# Altium PCB STM32EVALBOARD.PcbDoc (part 2 of 2)
Units mil, origin at the board's own origin, x right, y up, seen from the top; angles counter-clockwise.
Board outline 3937.01 x 3937.01 mil, 4 copper layers (Top Layer, GND, POWER, Bottom Layer), stack 23.756 mil thick; 220 components, 164 nets, 674 pads, 227 vias.
Unrouted connection lines stored in the file: 178.
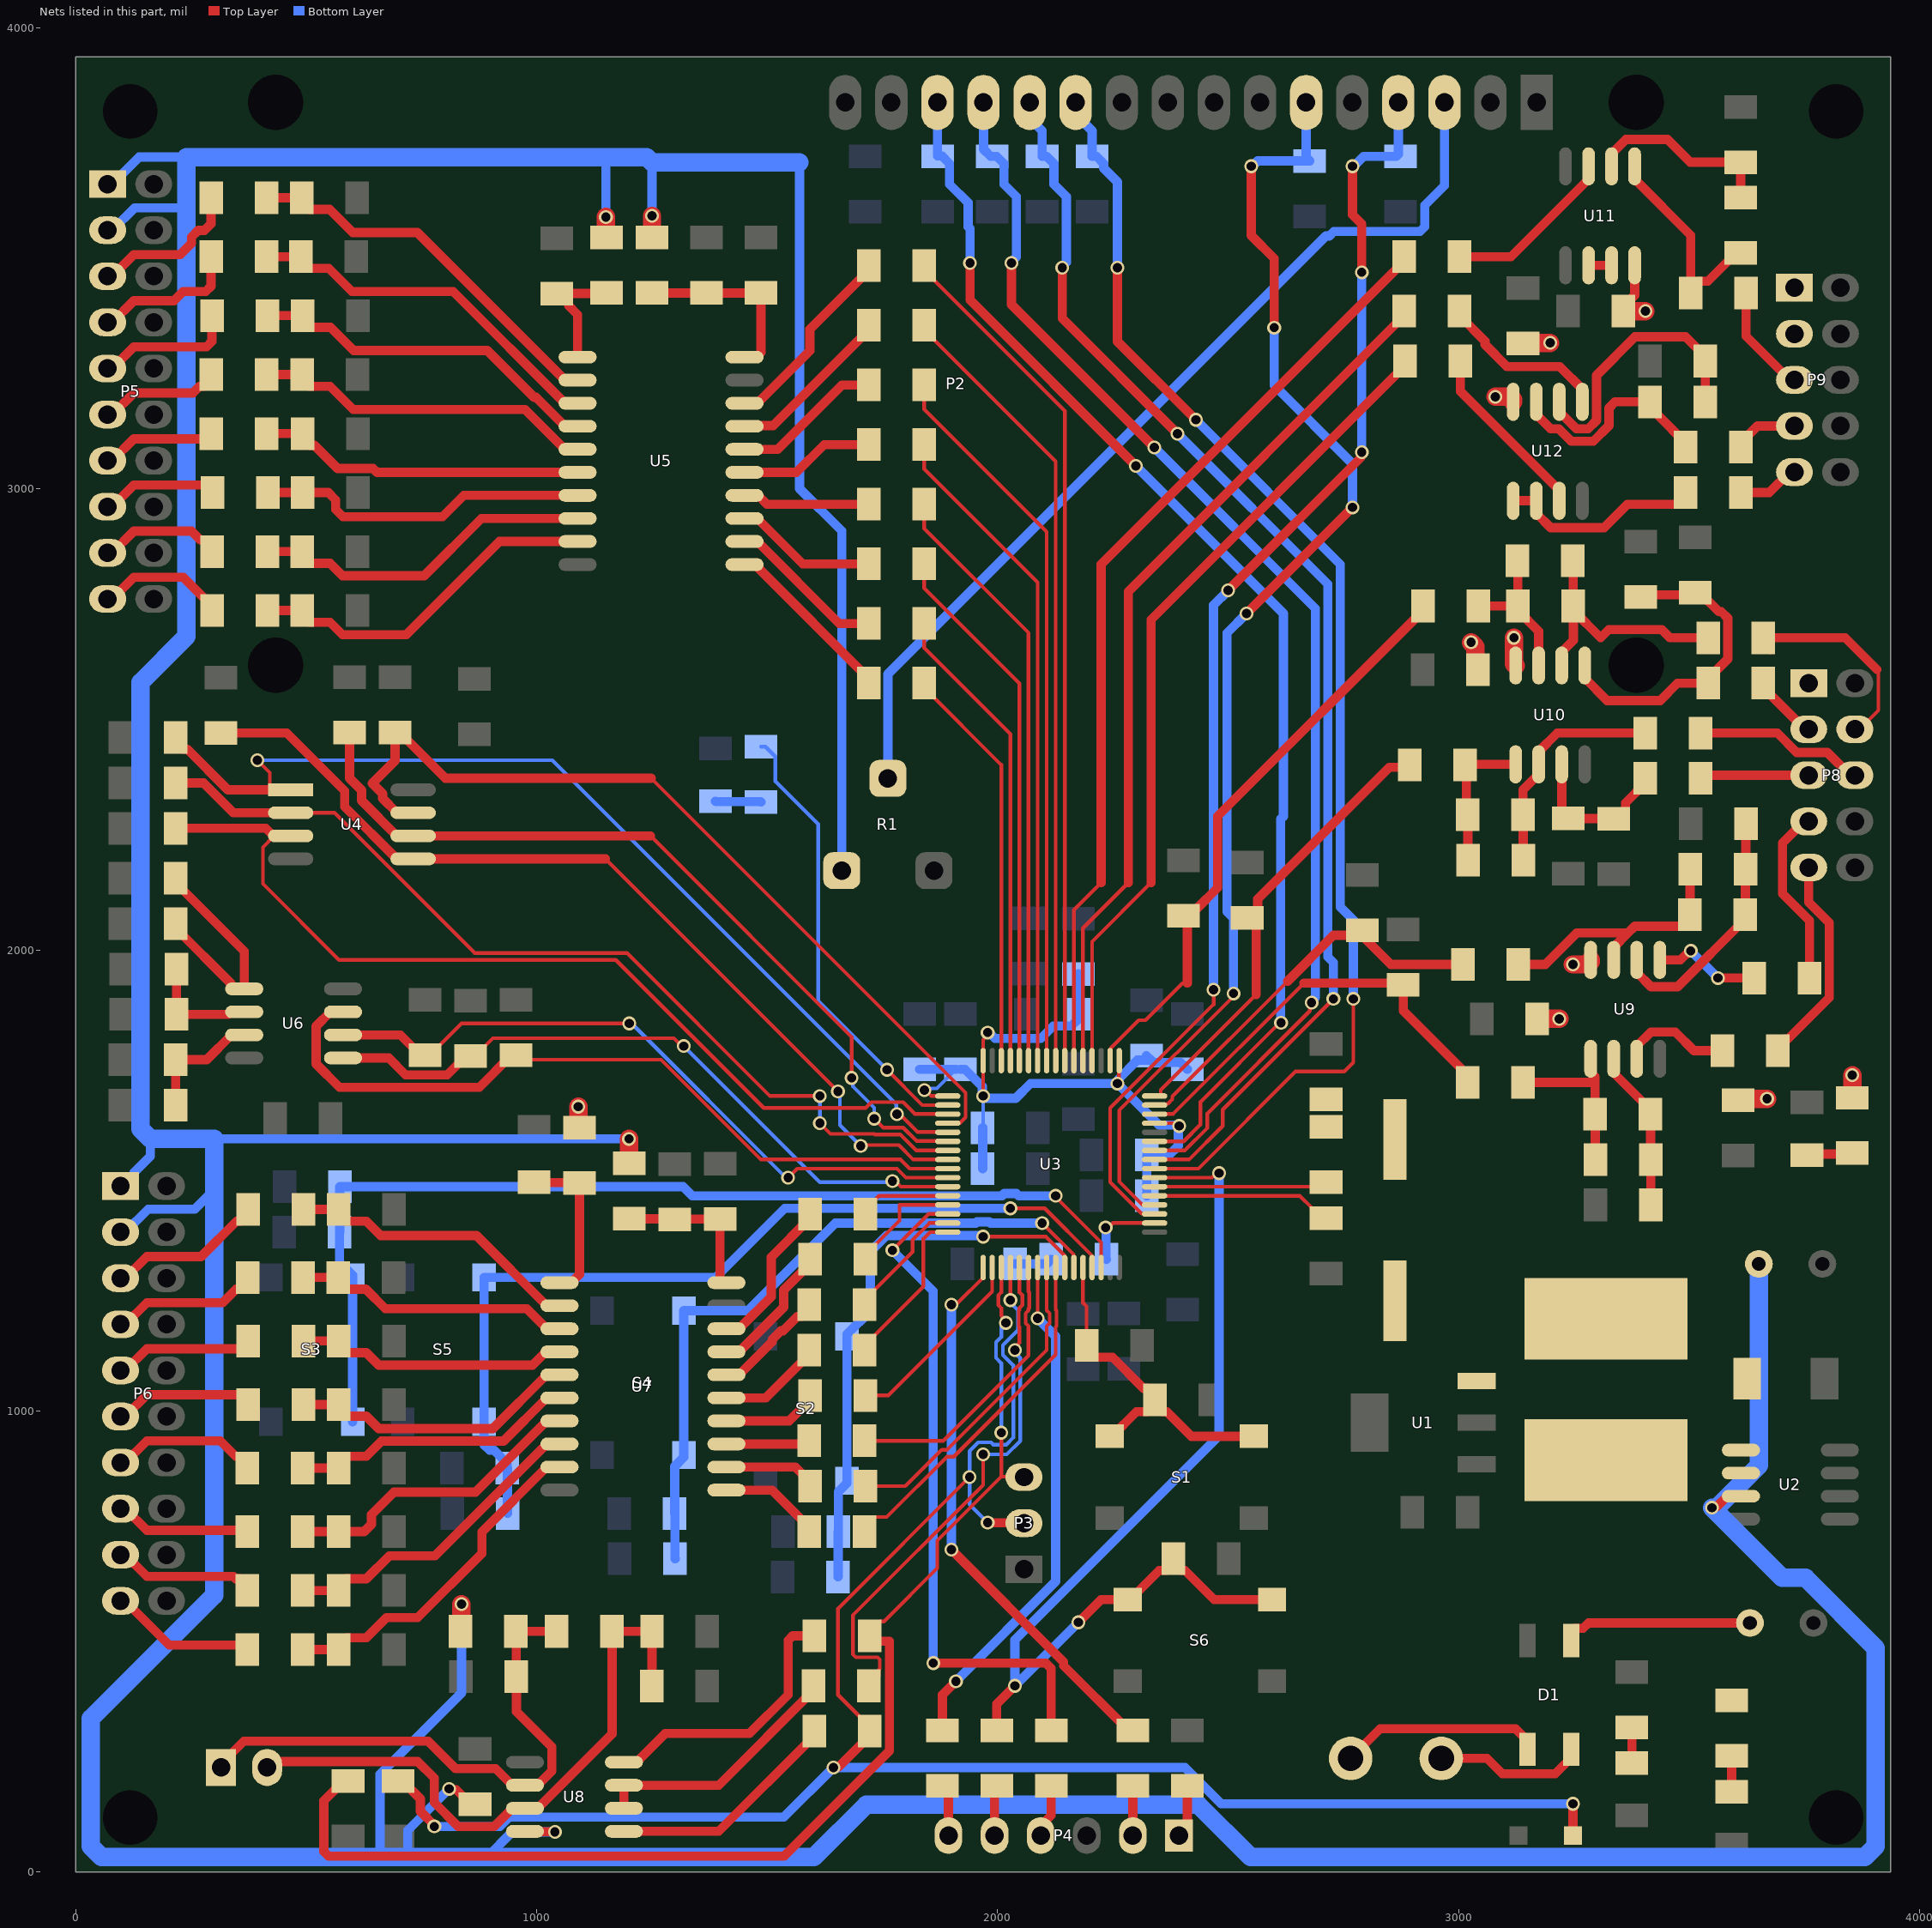
[diagram p4: the nets of this part, all layers, seen from the top]

## Via types
v1: diameter 30, hole 20, Top Layer to Bottom Layer, 227 vias

## Nets (pads, with @x,y where several pads share a name; then routed paths per layer and width w, separated by ;. In a path a pad name is that pad's centre, name@x,y a point inside that pad or via, vN(x,y) a via of type N, cw(c..) or ccw(c..) an arc to the next point about the centre after c; other vN are vias at no path point) (continued)
+5VD: C1.1 C5.1 C45.1 C57.1 C58.1 C68.1 C69.1 L1.2 P5.1 P5.3 P6.1 P6.3 P8.1 P9.1 P9.3 R1.1 R3.2 R24.1 R51.1 R53.1 R73.1 R76.1 U1.3 U2.3 U8.8 U9.8 U10.8 U11.8 U12.8 | length 16342.7
  Top Layer w20: 824.91,178.09 856.3,146.69 C45.1@866.14,146.69 ; U8.8@974.41,87.8 975,87.2 1038.78,87.2 v1(1039.37,86.61) ; C68.1@3357.24,3385.83 3357.24,3395.67 3382.09,3420.51 U11.8@3382.09,3485.24 ; v1(3550,790) 3551.91,791.91 3560.03,791.91 3581.67,813.55 3611.27,813.55 U2.3@3612.72,815
  Top Layer w40: P6.1@95.28,1486.22 P6.1@96.85,1487.8 ; R73.1@834.72,521.65 836.61,523.54 v1(836.61,580.71) ; v1(1090,1660) 1090,1616.69 R76.1@1092.52,1614.17 ; v1(1150,3590) 1150,3546.77 R51.1@1151.57,3545.2 ; v1(1200,1590) 1200,1538.11 R53.1@1200.79,1537.32 ; R24.1@1250,3545.2 v1(1250,3592.52) ; v1(3027.29,2667.32) 3036.69,2657.92 3036.69,2623.7 3042.28,2618.11 C57.1@3042.28,2608.27 ; v1(3080,3200) 3112.28,3200 3118.5,3193.78 U12.8@3118.5,3188.98 ; v1(3120.08,2677.17) 3120.08,2620.87 U10.8@3123.82,2617.13 ; C69.1@3139.76,3315.98 3140.71,3316.93 v1(3198.82,3316.93) ; C58.1@3170.24,1850.39 v1(3218.5,1850.39) ; v1(3248.03,1968.5) 3280.39,1968.5 3286.61,1974.72 U9.8@3286.61,1978.35 ; C68.1@3357.24,3385.83 v1(3405.51,3385.83) ; C1.1@3606.3,1674.17 3609.29,1677.17 v1(3669.29,1677.17) ; P9.3@3728.74,3336.61 P9.3@3733.33,3336.61 ; R3.2@3854.33,1679.06 v1(3854.33,1728.35)
  Bottom Layer w20: P5.3@78.9,3561.42 127.48,3610 240,3610 ; P5.1@78.9,3661.42 137.48,3720 240,3720 ; P6.3@96.85,1387.8 106.85,1387.8 156.78,1437.72 257.72,1437.72 300,1480 ; P6.1@96.85,1487.8 106.85,1487.8 126.85,1507.8 126.85,1517.8 161.72,1552.66 161.72,1590 ; 300,1590 1090,1590 ; 660,32 660,211.69 836.61,388.31 v1(836.61,580.71) ; 720,32 720,90 v1(810,180) ; 892,32 946.61,86.61 v1(1039.37,86.61) ; v1(1090,1660) 1090,1590 ; v1(1150,3590) 1150,3720 ; v1(1200,1590) 1090,1590 ; v1(1250,3592.52) 1250,3708.28 ; 1570,3708.28 1570,3000.69 1661.81,2908.88 R1.1@1661.81,2172.05
  Bottom Layer w40: P5.3@68.9,3561.42 P5.3@78.9,3561.42 ; P5.1@68.9,3661.42 P5.1@78.9,3661.42 ; 1570,3708.28 1250,3708.28 1238.28,3720 1150,3720 240,3720 240,3610 240,2680 140,2580 140,1611.72 161.72,1590 300,1590 300,1480 300,600.33 32,332.33 32,55.43 55.43,32 660,32 720,32 892,32 1601.53,32 1715.27,145.74 2434.81,145.74 2548.55,32 3881.58,32 3905.01,55.43 3905.01,485.6 3752.81,637.8 3702.2,637.8 v1(3550,790) ; v1@3560,790 3651.57,881.57 C5.1@3651.57,1318.9
BOOT0: C27.1 R5.2 S1.1 S1.2 U3.60 | length 761.5
  Top Layer w8: U3.60@2185.04,1311.02 2185.04,1234.73 2192.99,1226.78 R5.2@2192.99,1141.73
  Top Layer w20: R5.2@2192.99,1141.73 2192.99,1131.89 2208.58,1116.3 2248.9,1116.3 2316.14,1049.05 2325.98,1049.05 2341.57,1033.46 C27.1@2341.57,1023.62 C27.1@2341.57,1013.78 ; S1.1@2242.99,944.88 2247.91,944.88 2301.22,998.19 2325.98,998.19 C27.1@2341.57,1013.78 ; S1.2@2555.98,944.88 2420.31,944.88 2367.01,998.19 2357.17,998.19 C27.1@2341.57,1013.78
DACOUT1: P9.5 R100.2 | length 237.9
  Top Layer w20: R100.2@3623.94,3425.2 3623.94,3331.42 3718.74,3236.61 P9.5@3728.74,3236.61
DACOUT2: P9.7 R106.2 | length 141.4
  Top Layer w20: R106.2@3612.2,3090.55 3612.2,3100.39 3648.43,3136.61 P9.7@3728.74,3136.61
DACOUT3: P9.9 R102.2 | length 135
  Top Layer w20: R102.2@3612.2,2992.13 3674.25,2992.13 3718.74,3036.61 P9.9@3728.74,3036.61
DOWN: C29.1 R12.2 S2.1 S2.2 U3.58 | length 1215.3
  Top Layer w8: v1(1968.5,1377.95) 2104.62,1377.95 2144.94,1337.63 2144.94,1311.75 U3.58@2145.67,1311.02
  Bottom Layer w20: R12.2@1653.54,639.76 1654.02,640.24 1654.02,737.72 C29.1@1654.49,738.19 1654.49,824.76 1673.23,843.5 S2.1@1673.23,848.43 S2.2@1673.23,1161.42 1673.23,1166.34 1723.61,1216.72 1723.61,1345.64 1758.4,1380.43 1963.33,1380.43 1965.8,1377.95 v1(1968.5,1377.95)
ENTER: C31.1 R20.2 S3.1 S3.2 U3.62 | length 2284.1
  Top Layer w8: v1(2125.98,1466.54) 2125.98,1463.93 2224.41,1365.51 U3.62@2224.41,1311.02
  Bottom Layer w20: S3.1@600.39,976.38 S3.2@600.39,1289.37 600.39,1294.29 584.8,1309.88 584.29,1309.88 571.81,1322.36 C31.1@571.81,1387.8 572.28,1388.27 572.28,1485.75 R20.2@572.76,1486.22 1317.68,1486.22 1337.36,1466.54 2009.36,1466.54 2014.3,1471.48 2040.81,1471.48 2045.76,1466.54 v1(2125.98,1466.54)
ESC: C32.1 R21.2 S4.1 S4.2 U3.59 | length 1530.1
  Top Layer w8: v1(2096.46,1407.48) 2164.63,1339.31 2164.63,1311.75 U3.59@2165.35,1311.02
  Bottom Layer w20: C32.1@1300.16,679.13 1299.69,679.61 1299.69,777.09 R21.2@1299.21,777.56 1299.21,879.8 1318.9,899.49 S4.1@1318.9,904.41 S4.2@1318.9,1217.4 1458.03,1217.4 1648.11,1407.48 1952.78,1407.48 1955.25,1409.95 1981.76,1409.95 1984.23,1407.48 v1(2096.46,1407.48)
N\R\S\T\: C70.1 R10.1 S6.1 S6.2 U3.7 | length 2262.8
  Top Layer w8: U3.7@2340.55,1505.91 2464.52,1505.91 2474.36,1515.75 v1(2480.31,1515.75)
  Top Layer w20: R10.1@1998.03,307.01 1998.03,364.17 v1(2037.4,403.54) ; v1(2175.2,541.34) 2224.41,590.55 S6.1@2282.36,590.55 2287.28,590.55 2350.43,653.7 2365.35,653.7 C70.1@2380.94,669.29 ; C70.1@2380.94,679.13 C70.1@2380.94,669.29 ; S6.2@2595.35,590.55 2469.53,590.55 2406.38,653.7 2396.54,653.7 C70.1@2380.94,669.29
  Bottom Layer w20: v1(2175.2,541.34) v1(2037.4,403.54) 2037.4,503.15 2480.31,946.07 v1(2480.31,1515.75)
NetC26_2: C26.2 R6.2 Y1.2
NetC34_2: C34.2 R24.2 R25.2 U5.20 | length 405
  Top Layer w20: R24.2@1250,3425.2 R25.2@1368.11,3425.2 C34.2@1486.22,3425.2 1486.22,3295.94 1476.3,3286.02 U5.20@1450.79,3286.02
NetC36_1: C36.1 R27.1 U5.2 | length 844.9
  Top Layer w20: R27.1@413.39,3631.89 C36.1@490.24,3631.89 490.24,3622.05 505.83,3606.46 550.6,3606.46 600.69,3556.37 740.68,3556.37 1061.02,3236.02 U5.2@1088.58,3236.02
NetC37_1: C37.1 R29.1 U5.3 | length 812.6
  Top Layer w20: R29.1@413.39,3503.94 C37.1@488.35,3503.94 488.35,3494.09 503.94,3478.5 548.71,3478.5 598.8,3428.42 818.63,3428.42 1061.02,3186.02 U5.3@1088.58,3186.02
NetC38_1: C38.1 R31.1 U5.4 | length 778.5
  Top Layer w20: R31.1@415.28,3375.98 C38.1@492.13,3375.98 492.13,3366.14 507.72,3350.55 552.49,3350.55 602.58,3300.46 892.45,3300.46 994.09,3198.82 998.23,3198.82 1061.02,3136.02 U5.4@1088.58,3136.02
NetC39_1: C39.1 R36.1 U5.5 | length 748.1
  Top Layer w20: R36.1@413.39,3248.03 C39.1@491.18,3248.03 491.18,3238.19 506.77,3222.6 551.55,3222.6 601.64,3172.51 974.54,3172.51 1061.02,3086.02 U5.5@1088.58,3086.02
NetC40_1: C40.1 R41.1 U5.6 | length 715.8
  Top Layer w20: R41.1@413.39,3120.08 C40.1@492.13,3120.08 492.13,3110.24 507.72,3094.65 517.56,3094.65 567.65,3044.56 644.76,3044.56 653.29,3036.02 U5.6@1088.58,3036.02
NetC41_1: C41.1 R43.1 U5.7 | length 725.4
  Top Layer w20: R43.1@416.22,2992.13 C41.1@492.13,2992.13 547.72,2992.13 563.61,2976.24 563.61,2955.58 579.49,2939.69 795.35,2939.69 841.68,2986.02 U5.7@1088.58,2986.02
NetC42_1: C42.1 R45.1 U5.8 | length 752.3
  Top Layer w20: R45.1@415.28,2864.17 C42.1@491.18,2864.17 491.18,2854.33 506.77,2838.74 551.55,2838.74 578.55,2811.74 755.9,2811.74 880.18,2936.02 U5.8@1088.58,2936.02
NetC43_1: C43.1 R47.1 U5.9 | length 784.6
  Top Layer w20: R47.1@415.28,2736.22 C43.1@491.18,2736.22 491.18,2726.38 506.77,2710.79 551.55,2710.79 578.55,2683.79 716.92,2683.79 919.16,2886.02 U5.9@1088.58,2886.02
NetC44_2: C44.2 R53.2 R54.2 U7.20 | length 348
  Top Layer w20: R53.2@1200.79,1417.32 1201.73,1416.38 1298.27,1416.38 R54.2@1299.21,1415.43 1299.69,1415.91 1397.17,1415.91 C44.2@1397.64,1416.38 1397.64,1281.64 1401.13,1278.15 U7.20@1411.42,1278.15
NetC46_1: C46.1 R56.1 U7.2 | length 647.5
  Top Layer w20: R56.1@494.02,1437.01 C46.1@569.92,1437.01 569.92,1427.16 585.51,1411.57 630.29,1411.57 661.44,1380.43 869.38,1380.43 1021.65,1228.15 U7.2@1049.21,1228.15
NetC47_1: C47.1 R58.1 U7.3 | length 608
  Top Layer w20: R58.1@493.07,1289.37 C47.1@568.98,1289.37 568.98,1279.53 584.57,1263.94 629.34,1263.94 671.51,1221.77 978.04,1221.77 1021.65,1178.15 U7.3@1049.21,1178.15
NetC48_1: C48.1 R60.1 U7.4 | length 594.7
  Top Layer w20: R60.1@494.02,1151.58 C48.1@569.92,1151.58 569.92,1141.73 585.51,1126.14 630.29,1126.14 657.29,1099.14 990.6,1099.14 1019.61,1128.15 U7.4@1049.21,1128.15
NetC49_1: C49.1 R62.1 U7.5 | length 631.1
  Top Layer w20: R62.1@494.02,1013.78 C49.1@569.92,1013.78 569.92,1003.94 585.51,988.35 630.29,988.35 657.29,961.35 904.85,961.35 1021.65,1078.15 U7.5@1049.21,1078.15
NetC50_1: C50.1 R64.1 U7.6 | length 625.9
  Top Layer w20: R64.1@492.13,875.98 C50.1@569.92,875.98 569.92,885.83 585.51,901.42 630.29,901.42 663.22,934.35 927.85,934.35 1021.65,1028.15 U7.6@1049.21,1028.15
NetC51_1: C51.1 R66.1 U7.7 | length 668.6
  Top Layer w20: R66.1@492.13,738.19 C51.1@569.92,738.19 625.51,738.19 641.4,754.08 641.4,774.73 690.22,823.55 867.06,823.55 1021.65,978.15 U7.7@1049.21,978.15
NetC52_1: C52.1 R70.1 U7.8 | length 694.5
  Top Layer w20: R70.1@492.13,610.24 C52.1@569.92,610.24 569.92,620.08 585.51,635.67 630.29,635.67 680.38,685.76 779.26,685.76 1021.65,928.15 U7.8@1049.21,928.15
NetC53_1: C53.1 R72.1 U7.9 | length 754.1
  Top Layer w20: R72.1@492.13,482.28 C53.1@569.92,482.28 569.92,492.13 585.51,507.72 630.29,507.72 673.89,551.31 741.43,551.31 880.82,690.7 880.82,737.32 1021.65,878.15 U7.9@1049.21,878.15
NetC54_1: C54.1 P7.1 R73.2 R75.1 U8.6 | length 1221.9
  Top Layer w20: P7.1@314.96,226.38 314.96,233.88 364.46,283.38 764.39,283.38 823.67,224.1 910.54,224.1 946.85,187.8 U8.6@974.41,187.8 1001.61,187.8 1032.75,218.93 1032.75,270.67 955.67,347.75 C54.1@955.67,423.23 955.2,423.7 955.2,521.18 R73.2@954.72,521.65 R75.1@1043.31,521.65
NetC55_1: C55.1 P7.2 R75.2 R79.1 U8.7 | length 1354
  Top Layer w20: P7.2@414.96,226.38 428.02,239.44 741.29,239.44 777.48,203.25 777.48,150.29 829.34,98.43 907.48,98.43 946.85,137.8 U8.7@974.41,137.8 1001.97,137.8 1163.31,299.13 R75.2@1163.31,521.65 C55.1@1250,521.65 1249.78,521.44 1249.78,403.6 R79.1@1249.57,403.39
NetC56_1: C56.1 R81.1 R84.2 U10.6 | length 569.9
  Top Layer w20: U10.6@3223.82,2617.13 3223.82,2646.73 3248.98,2671.89 C56.1@3248.98,2736.22 ; R81.1@3248.03,2844.49 3248.5,2844.02 3248.5,2746.54 C56.1@3248.98,2746.06 C56.1@3248.98,2736.22 ; R84.2@3541.42,2677.17 3458.69,2677.17 3440.75,2695.11 3325.98,2695.11 3308.03,2677.17 C56.1@3248.98,2736.22
NetC56_2: C56.2 R81.2 R85.1 U10.7 | length 332.1
  Top Layer w20: R85.1@3043.23,2746.06 C56.2@3128.98,2746.06 ; R81.2@3128.03,2844.49 3128.5,2844.02 3128.5,2746.54 C56.2@3128.98,2746.06 ; U10.7@3173.82,2617.13 3173.82,2691.38 3128.98,2736.22 C56.2@3128.98,2746.06
NetC61_1: C61.1 R86.2 R88.2 U10.5 | length 704.2
  Top Layer w20: U10.5@3273.82,2617.13 3273.82,2589.57 3322.28,2541.11 3437.41,2541.11 3475.04,2578.74 R86.2@3541.42,2578.74 3541.42,2588.58 3584.01,2631.17 3584.01,2719.64 3569.87,2733.78 3564.49,2733.78 3523.62,2774.65 C61.1@3513.78,2774.65 3509.33,2770.2 3400.12,2770.2 R88.2@3395.67,2765.75
NetC62_1: C62.1 R83.1 R87.1 U9.7 | length 602.5
  Top Layer w20: R83.1@3129.92,1978.35 R83.1@3129.92,1968.5 3188.35,1968.5 3256.53,2036.68 3367.39,2036.68 ; U9.7@3336.61,1978.35 3336.61,2005.91 3367.39,2036.68 ; C62.1@3502.52,2174.72 C62.1@3502.52,2164.88 ; C62.1@3502.99,2165.35 C62.1@3502.52,2164.88 ; 3367.39,2036.68 3382.05,2051.34 3486.46,2051.34 3502.05,2066.93 R87.1@3502.05,2076.77 3502.52,2077.24 C62.1@3502.52,2164.88
NetC62_2: C62.2 R87.2 R89.1 U9.6 | length 543.9
  Top Layer w20: U9.6@3386.61,1978.35 3386.61,1951.14 3417.75,1920.01 3475.13,1920.01 3622.05,2066.93 R87.2@3622.05,2076.77 3622.52,2077.24 C62.2@3622.52,2164.88 ; C62.2@3622.52,2174.72 C62.2@3622.52,2164.88 ; R89.1@3623.94,2263.78 3623.46,2263.31 3623.46,2165.83 C62.2@3622.52,2164.88
NetC63_1: C63.1 R90.1 R92.2 U10.2 | length 500.7
  Top Layer w20: C63.1@3140.71,2194.88 3140.24,2195.35 3140.24,2292.83 R90.1@3139.76,2293.31 3139.76,2347.42 3165.9,2373.55 3170.33,2373.55 3173.82,2377.05 U10.2@3173.82,2402.56 3173.82,2430.12 3214.17,2470.47 R92.2@3405.51,2470.47
NetC63_2: C63.2 R90.2 R94.1 U10.1 | length 320.1
  Top Layer w20: C63.2@3020.71,2194.88 3020.24,2195.35 3020.24,2292.83 R90.2@3019.76,2293.31 3016.73,2296.34 3016.73,2398.54 R94.1@3013.7,2401.57 3014.69,2402.56 U10.1@3123.82,2402.56
NetC66_1: C66.1 R95.2 R96.2 U10.3 | length 343.9
  Top Layer w20: U10.3@3223.82,2402.56 3223.82,2299.72 R96.2@3238.19,2285.35 3238.66,2284.88 3336.14,2284.88 C66.1@3336.61,2284.41 3346.46,2284.41 3362.05,2300 3362.05,2318.74 3405.51,2362.2 R95.2@3405.51,2372.05
NetC67_1: C67.1 R93.1 R97.1 U9.1 | length 379.4
  Top Layer w20: R93.1@3139.76,1712.6 3296.3,1712.6 ; U9.1@3286.61,1763.78 3286.61,1734.18 3296.3,1724.49 3296.3,1712.6 ; R97.1@3297.24,1545.28 3296.77,1545.75 3296.77,1643.23 C67.1@3296.3,1643.7 3296.3,1712.6
NetC67_2: C67.2 R97.2 R98.1 U9.2 | length 350.3
  Top Layer w20: U9.2@3336.61,1763.78 3338.06,1762.33 3338.06,1731.78 3416.3,1653.54 C67.2@3416.3,1643.7 3416.77,1643.23 3416.77,1545.75 R97.2@3417.24,1545.28 R98.1@3417.24,1446.85
NetD1_2: D1.2 P1.1 | length 328.3
  Top Layer w20: P1.1@2962.6,246.06 3061.79,246.06 3095.33,212.53 3209.38,212.53 3244.09,247.24 D1.2@3244.09,265.75
NetD1_3: D1.3 P1.2 | length 439.8
  Top Layer w20: P1.2@2765.75,246.06 2829.99,310.31 3123.55,310.31 3149.61,284.25 D1.3@3149.61,265.75
NetD2_2: D2.2 L1.1 U2.2
NetH1_1: H1.1 R2.1 | length 76.9
  Top Layer w20: H1.1@3375.98,236.22 R2.1@3375.98,313.07
NetH2_1: H2.1 R3.1 | length 100.1
  Top Layer w20: H2.1@3755.91,1555.12 3757.87,1557.09 3852.36,1557.09 R3.1@3854.33,1559.06
NetH3_1: H3.1 R4.1 | length 78.7
  Top Layer w20: H3.1@3592.52,173.23 R4.1@3592.52,251.97
NetH4_1: H4.1 R19.1 | length 99.2
  Bottom Layer w20: H4.1@1387.8,2322.83 1388.74,2321.89 1485.28,2321.89 R19.1@1486.22,2320.94
NetH5_1: H5.1 R23.1 | length 82.8
  Bottom Layer w20: H5.1@2037.4,1318.9 2106.3,1318.9 R23.1@2116.14,1328.74
NetP2_3: P2.3 R1.2 | length 2080.5
  Bottom Layer w20: R1.2@1761.81,2372.05 1761.81,2598.43 2712.37,3548.98 2719.64,3548.98 2729.48,3558.83 2916.49,3558.83 2926.45,3568.79 2926.45,3615.43 2969.29,3658.27 P2.3@2969.29,3838.58
NetP4_1: P4.1 R7.2 | length 115.8
  Top Layer w20: P4.1@2393.31,78.74 2411.42,96.85 R7.2@2411.42,187.01
NetP4_2: P4.2 R8.2 | length 108.3
  Top Layer w20: P4.2@2293.31,78.74 R8.2@2293.31,187.01
NetP4_4: P4.4 R9.2 | length 117.7
  Top Layer w20: P4.4@2093.31,78.74 2093.31,99.56 2116.14,122.4 R9.2@2116.14,187.01
NetP4_5: P4.5 R10.2 | length 110.2
  Top Layer w20: P4.5@1993.31,78.74 1993.31,182.28 R10.2@1998.03,187.01
NetP4_6: P4.6 R11.2 | length 113.8
  Top Layer w20: R11.2@1879.92,187.01 1893.31,173.62 P4.6@1893.31,78.74
NetP5_5: P5.5 R27.2 | length 336.1
  Top Layer w20: P5.5@68.9,3461.42 78.9,3461.42 125.9,3508.42 226.36,3508.42 250.8,3532.85 250.8,3546.41 265.31,3560.93 278.87,3560.93 293.39,3575.44 R27.2@293.39,3631.89
NetP5_7: P5.7 R29.2 | length 320.9
  Top Layer w20: P5.7@68.9,3361.42 78.9,3361.42 125.9,3408.42 212.95,3408.42 232.78,3428.24 257.14,3428.24 257.31,3428.42 281.67,3428.42 293.39,3440.13 R29.2@293.39,3503.94
NetP5_9: P5.9 R31.2 | length 306.5
  Top Layer w20: P5.9@68.9,3261.42 78.9,3261.42 125.9,3308.42 283.56,3308.42 295.28,3320.13 R31.2@295.28,3375.98
NetP5_11: P5.11 R36.2 | length 266.1
  Top Layer w20: P5.11@68.9,3161.42 78.9,3161.42 125.9,3208.42 253.77,3208.42 267.95,3222.6 277.8,3222.6 293.39,3238.19 R36.2@293.39,3248.03
NetP5_13: P5.13 R41.2 | length 248.8
  Top Layer w20: P5.13@68.9,3061.42 78.9,3061.42 125.9,3108.42 281.72,3108.42 R41.2@293.39,3120.08
NetP5_15: P5.15 R43.2 | length 253.9
  Top Layer w20: P5.15@68.9,2961.42 78.9,2961.42 125.9,3008.42 280.63,3008.42 296.22,2992.83 R43.2@296.22,2992.13
NetP5_17: P5.17 R45.2 | length 269.9
  Top Layer w20: P5.17@68.9,2861.42 78.9,2861.42 125.9,2908.42 251.03,2908.42 269.84,2889.61 279.68,2889.61 295.28,2874.02 R45.2@295.28,2864.17
NetP5_19: P5.19 R47.2 | length 281.5
  Top Layer w20: P5.19@68.9,2761.42 78.9,2761.42 125.9,2808.42 232.92,2808.42 295.28,2746.06 R47.2@295.28,2736.22
NetP6_5: P6.5 R56.2 | length 344.7
  Top Layer w20: P6.5@96.85,1287.8 106.85,1287.8 153.85,1334.8 271.8,1334.8 348.58,1411.57 358.43,1411.57 374.02,1427.17 R56.2@374.02,1437.01
NetP6_7: P6.7 R58.2 | length 324.1
  Top Layer w20: P6.7@96.85,1187.8 106.85,1187.8 153.85,1234.8 318.5,1234.8 347.64,1263.94 357.48,1263.94 373.07,1279.53 R58.2@373.07,1289.37
NetP6_9: P6.9 R60.2 | length 304.3
  Top Layer w20: P6.9@96.85,1087.8 106.85,1087.8 153.85,1134.8 358.43,1134.8 374.02,1150.39 R60.2@374.02,1151.58
NetP6_11: P6.11 R62.2 | length 308.5
  Top Layer w20: P6.11@96.85,987.8 106.85,987.8 153.85,1034.8 358.43,1034.8 374.02,1019.2 R62.2@374.02,1013.78
NetP6_13: P6.13 R64.2 | length 324.9
  Top Layer w20: P6.13@96.85,887.8 106.85,887.8 153.85,934.8 313.32,934.8 346.69,901.42 356.54,901.42 372.13,885.83 R64.2@372.13,875.98
NetP6_15: P6.15 R66.2 | length 295.8
  Top Layer w20: P6.15@96.85,787.8 106.85,787.8 153.85,740.8 369.52,740.8 R66.2@372.13,738.19
NetP6_17: P6.17 R70.2 | length 313.2
  Top Layer w20: P6.17@96.85,687.8 106.85,687.8 153.85,640.8 341.57,640.8 346.69,635.67 356.54,635.67 372.13,620.08 R70.2@372.13,610.24
NetP6_19: P6.19 R72.2 | length 319
  Top Layer w20: P6.19@96.85,587.8 106.85,587.8 202.52,492.13 362.28,492.13 R72.2@372.13,482.28
NetR26_2: R26.2 U5.18 | length 426.1
  Top Layer w20: U5.18@1450.79,3186.02 1478.35,3186.02 1592.38,3300.05 1592.38,3346.23 1720.55,3474.41 R26.2@1720.55,3484.25
NetR28_2: R28.2 U5.17 | length 366.2
  Top Layer w20: U5.17@1450.79,3136.02 1452.23,3137.47 1512.97,3137.47 1720.55,3345.05 R28.2@1720.55,3354.89
NetR30_2: R30.2 U5.16 | length 327.6
  Top Layer w20: U5.16@1450.79,3086.02 1522.92,3086.02 1662.43,3225.53 R30.2@1720.55,3225.53
NetR35_2: R35.2 U5.15 | length 294.7
  Top Layer w20: U5.15@1450.79,3036.02 1563.32,3036.02 1623.48,3096.18 R35.2@1720.55,3096.18
NetR37_2: R37.2 R48.1 U6.1 | length 519.6
  Top Layer w20: R48.1@216.54,2057.09 216.54,2047.24 336.15,1927.63 336.15,1919.04 339.64,1915.55 U6.1@365.16,1915.55 365.16,1997.05 216.54,2145.67 R37.2@216.54,2155.51
NetR38_2: R38.2 R49.1 U6.2 | length 247.4
  Top Layer w20: R38.2@218.43,1958.66 R49.1@218.43,1860.24 330.24,1860.24 335.55,1865.55 U6.2@365.16,1865.55
NetR39_2: R39.2 R50.1 U6.3 | length 269.3
  Top Layer w20: R50.1@216.54,1663.39 R39.2@216.54,1761.81 283.86,1761.81 337.6,1815.55 U6.3@365.16,1815.55
NetR40_2: R40.2 U5.14 | length 277.7
  Top Layer w20: U5.14@1450.79,2986.02 1480.39,2986.02 1499.6,2966.82 R40.2@1720.55,2966.82
NetR42_2: R42.2 U5.13 | length 310.6
  Top Layer w20: U5.13@1450.79,2936.02 1478.35,2936.02 1576.91,2837.46 R42.2@1720.55,2837.46
NetR44_2: R44.2 U5.12 | length 343.5
  Top Layer w20: U5.12@1450.79,2886.02 1478.35,2886.02 1656.27,2708.1 R44.2@1720.55,2708.1
NetR46_2: R46.2 U5.11 | length 384
  Top Layer w20: U5.11@1450.79,2836.02 1476.3,2836.02 1479.79,2832.53 1479.79,2829.34 1720.55,2588.58 R46.2@1720.55,2578.74
NetR51_2: R51.2 R52.1 U5.1 | length 270.9
  Top Layer w20: U5.1@1088.58,3286.02 1088.58,3378.03 1068.74,3397.87 1068.74,3407.72 1053.15,3423.31 R52.1@1043.31,3423.31 1044.25,3424.25 1150.63,3424.25 R51.2@1151.57,3425.2
NetR55_2: R55.2 U7.18 | length 340.2
  Top Layer w20: U7.18@1411.42,1178.15 1438.98,1178.15 1508.72,1247.89 1508.72,1333.44 1592.6,1417.32 R55.2@1592.6,1427.17
NetR57_2: R57.2 U7.17 | length 291.8
  Top Layer w20: U7.17@1411.42,1128.15 1438.98,1128.15 1535.72,1224.89 1535.72,1262.01 1592.6,1318.9 R57.2@1592.6,1328.74
NetR59_2: R59.2 U7.16 | length 250.8
  Top Layer w20: U7.16@1411.42,1078.15 1438.98,1078.15 1511.12,1150.29 1511.12,1154.99 1529.86,1173.73 1534.56,1173.73 1565.71,1204.88 1575.12,1204.88 1590.71,1220.47 R59.2@1590.71,1230.32
NetR61_2: R61.2 U7.15 | length 228
  Top Layer w20: U7.15@1411.42,1028.15 1496.81,1028.15 1590.71,1122.05 R61.2@1590.71,1131.89
NetR63_2: R63.2 U7.14 | length 209.9
  Top Layer w20: U7.14@1411.42,978.15 1547.13,978.15 1592.6,1023.62 R63.2@1592.6,1033.46
NetR65_2: R65.2 U7.13 | length 182.1
  Top Layer w20: U7.13@1411.42,928.15 1583.82,928.15 R65.2@1590.71,935.04
NetR69_2: R69.2 U7.12 | length 204.2
  Top Layer w20: U7.12@1411.42,878.15 1560.91,878.15 1592.6,846.46 R69.2@1592.6,836.61
NetR71_2: R71.2 U7.11 | length 222.3
  Top Layer w20: U7.11@1411.42,828.15 1510.59,828.15 1590.71,748.03 R71.2@1590.71,738.19
NetR74_1: R74.1 U8.1 | length 509.2
  Top Layer w20: U8.1@1188.98,87.8 1394.96,87.8 1602.44,295.28 R74.1@1602.44,305.12
NetR76_2: R76.2 R80.1 U7.1 | length 348.1
  Top Layer w20: R80.1@994.09,1496.06 995.04,1495.12 1091.57,1495.12 R76.2@1092.52,1494.17 1092.52,1295.94 1074.73,1278.15 U7.1@1049.21,1278.15
NetR77_1: R77.1 U8.2 U8.3 | length 556.7
  Top Layer w20: U8.2@1188.98,137.8 U8.3@1188.98,187.8 1394.65,187.8 1600.55,393.7 R77.1@1600.55,403.54
NetR78_1: R78.1 U8.4 | length 596.2
  Top Layer w20: U8.4@1188.98,237.8 1216.54,237.8 1278.82,300.08 1461.49,300.08 1545.28,383.86 1545.28,501.97 1555.12,511.81 R78.1@1602.44,511.81
NetR82_2: R82.2 U9.5 | length 237.7
  Top Layer w20: U9.5@3436.61,1978.35 3481.55,1978.35 3501.23,1998.03 v1(3503.94,1998.03) ; v1(3562.99,1938.98) R82.2@3641.73,1938.98
  Bottom Layer w20: v1(3503.94,1998.03) v1(3562.99,1938.98)
NetR91_2: R91.2 U9.3 | length 243.1
  Top Layer w20: U9.3@3386.61,1763.78 3386.61,1790.98 3417.75,1822.12 3470.24,1822.12 3510.87,1781.5 R91.2@3572.83,1781.5
NetR99_2: R99.2 U11.3 | length 387.2
  Top Layer w20: R99.2@3001.97,3513.78 R99.2@3001.97,3503.94 3113.78,3503.94 3282.09,3672.24 U11.3@3282.09,3699.8
NetR100_1: R100.1 R103.2 U11.1 | length 465.2
  Top Layer w20: U11.1@3382.09,3699.8 3382.09,3672.24 3503.94,3550.39 R100.1@3503.94,3435.04 ; R100.1@3503.94,3425.2 R100.1@3503.94,3435.04 ; R103.2@3612.2,3511.89 3602.36,3511.89 3541.1,3450.63 3519.53,3450.63 R100.1@3503.94,3435.04
NetR101_2: R101.2 U12.3 | length 393.5
  Top Layer w20: R101.2@3003.86,3277.56 3003.86,3212.13 3212.57,3003.41 3215.01,3003.41 3218.5,2999.92 U12.3@3218.5,2974.41
NetR102_1: R102.1 U12.1 U12.2 | length 451.1
  Top Layer w20: U12.1@3118.5,2974.41 U12.2@3168.5,2974.41 3168.5,2947.2 3199.64,2916.07 3315.87,2916.07 3366.5,2966.69 3476.61,2966.69 3492.2,2982.28 R102.1@3492.2,2992.13
NetR103_1: R103.1 R104.2 U11.2 | length 417.5
  Top Layer w20: U11.2@3332.09,3699.8 3332.09,3727.01 3363.22,3758.14 3453.35,3758.14 3502.76,3708.74 R104.2@3612.2,3708.74 R103.1@3612.2,3631.89
NetR105_2: R105.2 U12.5 | length 374.2
  Top Layer w20: R105.2@3001.97,3385.83 3001.97,3375.98 3057.42,3320.53 3057.42,3313.26 3105.06,3265.62 3219.42,3265.62 3268.5,3216.54 U12.5@3268.5,3188.98
NetR106_1: R106.1 R107.2 U12.7 | length 486.1
  Top Layer w20: U12.7@3168.5,3188.98 3168.5,3161.77 3199.64,3130.64 3217.57,3130.64 3244.57,3103.64 3292.44,3103.64 3326.28,3137.48 3326.28,3175.67 3339.59,3188.98 R107.2@3415.35,3188.98 3430.94,3173.39 3430.94,3161.65 3492.2,3100.39 R106.1@3492.2,3090.55
NetR107_1: R107.1 R108.2 U12.6 | length 611.9
  Top Layer w20: U12.6@3218.5,3188.98 3218.5,3163.46 3222,3159.97 3226.42,3159.97 3255.75,3130.64 3281.25,3130.64 3299.28,3148.67 3299.28,3246.55 3382.72,3329.99 3492.76,3329.99 3535.35,3287.4 R108.2@3535.35,3277.56 R107.1@3535.35,3188.98
NetU11_6: U11.6 U11.7 | length 50
  Top Layer w20: U11.6@3282.09,3485.24 U11.7@3332.09,3485.24
"OSC IN": C28.2 U3.5 Y1.1 | length 391
  Top Layer w8: U3.5@2340.55,1466.54 2655.51,1466.54 2681.17,1440.88 2681.17,1439.86 2698.82,1422.2 C28.2@2712.6,1422.2
"OSC OUT": R6.1 U3.6 | length 371.3
  Top Layer w8: U3.6@2340.55,1486.22 2700.87,1486.22 R6.1@2708.66,1478.43
"R\E\ DE MB": R77.2 U3.53 | length 1164.6
  Top Layer w8: R77.2@1720.55,403.54 1742.14,425.13 1742.14,437.77 1744.03,439.66 1744.03,460.69 1739.35,465.38 1692.29,465.38 1685.85,471.82 1685.85,556.61 1968.5,839.26 v1(1968.5,905.51) ; v1(2037.4,1131.89) 2037.4,1137.84 2047.24,1147.69 2047.24,1182.17 2045.61,1183.8 2045.61,1217.77 2047.24,1219.4 2047.24,1223.07 2053.56,1229.39 2053.56,1250.93 2047.24,1257.24 U3.53@2047.24,1311.02
  Bottom Layer w8: v1(1968.5,905.51) 2019.69,905.51 2048.87,934.7 2048.87,1114.46 2037.4,1125.94 v1(2037.4,1131.89)
"RX MB": D3.2 P3.2 R67.2 R74.2 U3.52 | length 4337
  Top Layer w8: R74.2@1722.44,305.12 1722.44,314.96 1653.54,383.86 1653.54,570.87 v1(1938.98,856.3) ; v1(2027.56,1240.16) U3.52@2027.56,1311.02
  Top Layer w20: R67.2@698.82,196.85 708.66,196.85 747.36,158.15 747.36,131.33 777.56,101.13 v1(777.56,98.43) ; v1(1643.7,226.38) 1645.61,228.29 1655.46,228.29 1722.44,295.28 R74.2@1722.44,305.12 ; v1(1978.35,757.87) 1979.13,757.09 2056.3,757.09 P3.2@2057.09,756.3 ; D3.2@3248.03,78.74 v1(3248.03,147.64)
  Bottom Layer w8: v1(1978.35,757.87) 1938.98,797.24 v1(1938.98,856.3) 1938.98,912.75 1957.73,931.51 1985.74,931.51 1990.63,926.62 2018.64,926.62 2033.87,941.85 2033.87,1098.65 2011.4,1121.12 2011.4,1142.66 2043.72,1174.97 2043.72,1218.13 2027.56,1234.29 v1(2027.56,1240.16)
  Bottom Layer w20: v1(777.56,98.43) 920.24,98.43 940.43,118.61 1535.94,118.61 v1(1643.7,226.38) 2406.5,226.38 2485.24,147.64 v1(3248.03,147.64)
SCL: R32.2 U3.42 U6.6 | length 1513.7
  Top Layer w8: R32.2@757.87,1771.65 767.72,1771.65 836.61,1840.55 v1(1200.79,1840.55) ; v1(1545.28,1505.91) 1564.96,1525.59 1781.37,1525.59 1801.05,1505.91 U3.42@1891.73,1505.91
  Top Layer w20: U6.6@579.72,1815.55 704.13,1815.55 748.03,1771.65 R32.2@757.87,1771.65
  Bottom Layer w8: v1(1200.79,1840.55) 1205.71,1840.55 1540.35,1505.91 v1(1545.28,1505.91)
SDA: R33.2 U3.43 U6.5 | length 1495.4
  Top Layer w8: R33.2@856.3,1769.76 866.14,1769.76 904.62,1808.24 1297.62,1808.24 1314.53,1791.34 v1(1318.9,1791.34) ; v1(1771.65,1498.54) 1777.61,1498.54 1789.92,1486.22 U3.43@1891.73,1486.22
  Top Layer w20: U6.5@579.72,1765.55 678.91,1765.55 715.4,1729.06 805.76,1729.06 846.46,1769.76 R33.2@856.3,1769.76
  Bottom Layer w8: v1(1318.9,1791.34) 1614.17,1496.06 1769.18,1496.06 v1(1771.65,1498.54)
SWCLK: R8.1 U3.49 | length 1207.2
  Top Layer w8: v1(1899.61,1230.32) 1903.82,1234.52 1913.66,1234.52 1968.5,1289.37 U3.49@1968.5,1311.02
  Top Layer w20: v1(1899.61,698.82) 2143.14,455.28 2143.14,447.33 2283.46,307.01 R8.1@2293.31,307.01
  Bottom Layer w20: v1(1899.61,698.82) v1(1899.61,1230.32)
SWDIO: R9.1 U3.46 | length 1479.8
  Top Layer w8: v1(1771.65,1348.43) 1850.39,1427.17 U3.46@1891.73,1427.17
  Top Layer w20: v1(1860.24,452.76) 2104.43,452.76 2116.14,441.04 R9.1@2116.14,307.01
  Bottom Layer w20: v1(1771.65,1348.43) 1860.24,1259.84 v1(1860.24,452.76)
TEST1: R19.2 U3.34 | length 983.6
  Top Layer w8: v1(1760,1740) 1836.61,1663.39 U3.34@1891.73,1663.39
  Bottom Layer w8: R19.2@1486.22,2440.94 1496.06,2440.94 1517.65,2419.35 1517.65,2366.09 1610.81,2272.93 1610.81,1889.19 v1(1760,1740)
TEST2: R23.2 U3.2 | length 180.1
  Top Layer w8: v1(2234.25,1397.64) 2240.21,1397.64 2250.05,1407.48 U3.2@2340.55,1407.48
  Bottom Layer w20: v1(2234.25,1397.64) 2235.2,1396.69 2235.2,1329.69 R23.2@2236.14,1328.74
TRCSWIO: R11.1 U3.55 | length 1122.2
  Top Layer w8: v1(2086.61,1200.79) U3.55@2086.61,1311.02
  Top Layer w20: R11.1@1879.92,307.01 1879.92,383.86 v1(1909.45,413.39)
  Bottom Layer w20: v1(1909.45,413.39) 2125.98,629.92 2125.98,1161.42 v1(2086.61,1200.79)
"TX MB": P3.3 R68.2 R78.2 U3.51 | length 2789.1
  Top Layer w8: R78.2@1722.44,511.81 1722.44,521.65 1744.03,543.24 1753.24,543.24 1868.76,658.77 1868.76,718.31 2007.87,857.42 ; v1(2007.87,952.62) 2007.87,857.42 ; U3.51@2007.87,1311.02 2007.87,1257.24 2001.56,1250.93 2001.56,1229.39 2007.87,1223.07 2007.87,1206.74 2017.72,1196.9 v1(2017.72,1190.94) ; P3.3@2057.09,856.3 2055.97,857.42 2007.87,857.42
  Top Layer w20: R68.2@590.55,196.85 580.71,196.85 538.12,154.26 538.12,44.22 548.08,34.26 1536.65,34.26 1765.03,262.64 1765.03,500.1 1734.16,500.1 R78.2@1722.44,511.81
  Bottom Layer w8: v1(2007.87,952.62) 2007.87,1103.43 1996.4,1114.91 1996.4,1148.87 2007.87,1160.34 2007.87,1186.26 2012.56,1190.94 v1(2017.72,1190.94)
"uCE FLASH": R16.1 U3.37 U4.1 | length 2225.2
  Top Layer w8: v1(393.7,2411.42) 420.74,2384.38 420.74,2357.21 430.52,2347.43 U4.1@465.95,2347.43 ; v1(1781.5,1643.7) 1787.45,1643.7 1826.09,1605.06 1891,1605.06 U3.37@1891.73,1604.33
  Top Layer w20: R16.1@216.54,2460.63 216.54,2450.79 232.13,2435.2 241.97,2435.2 329.73,2347.43 U4.1@430.52,2347.43
  Bottom Layer w8: v1(393.7,2411.42) 1033.46,2411.42 1780.25,1664.64 1780.25,1644.95 v1(1781.5,1643.7)
uD4: C8.1 P2.11 U3.8 | length 2864.5
  Top Layer w8: U3.8@2340.55,1525.59 2435.59,1525.59 2646.22,1736.22 2751.97,1736.22 2771.65,1755.91 v1(2771.65,1893.7)
  Top Layer w20: v1(2260,3480) 2260,3320 v1(2430,3150)
  Bottom Layer w20: P2.11@2169.29,3838.58 2169.29,3812.44 2204.72,3777.01 C8.1@2204.72,3721.42 2214.57,3721.42 2230.16,3705.83 2230.16,3695.98 2260,3666.14 v1(2260,3480) ; v1(2430,3150) 2743.48,2836.52 2743.48,2093.15 2771.65,2064.98 v1(2771.65,1893.7)
uD5: C9.1 P2.12 U3.9 | length 2783.9
  Top Layer w8: U3.9@2340.55,1545.28 2415.35,1545.28 2488.19,1618.11 2488.19,1653.54 v1(2728.35,1893.7)
  Top Layer w20: v1(2140,3480) 2140,3370 v1(2390,3120)
  Bottom Layer w20: P2.12@2069.29,3838.58 2069.29,3804.17 2096.46,3777.01 C9.1@2096.46,3721.42 2106.3,3721.42 2121.89,3705.83 2121.89,3661.05 2148.89,3634.05 2148.89,3491.6 2140,3482.71 v1(2140,3480) ; v1(2390,3120) 2716.48,2793.52 2716.48,1984.77 2728.35,1972.9 v1(2728.35,1893.7)
uD6: C10.1 P2.13 U3.10 | length 2771.3
  Top Layer w8: U3.10@2340.55,1564.96 2405.91,1564.96 2455,1614.05 2455,1645 2677.37,1867.37 2677.37,1882.1 v1(2681.1,1885.83)
  Top Layer w20: v1(2030,3490) 2030,3400 v1(2340,3090)
  Bottom Layer w20: P2.13@1969.29,3838.58 1969.29,3737.01 1984.88,3721.42 C10.1@1988.19,3721.42 1998.03,3721.42 2013.62,3705.83 2013.62,3661.05 2040.62,3634.05 2040.62,3503.33 2030,3492.71 v1(2030,3490) ; v1(2340,3090) 2689.48,2740.52 2689.48,1896.91 2681.1,1888.53 v1(2681.1,1885.83)
uD7: C11.1 P2.14 U3.11 | length 2725.9
  Top Layer w8: U3.11@2340.55,1584.65 2403.54,1584.65 2440,1621.1 2440,1670 2611.73,1841.73 v1(2614.96,1841.73)
  Top Layer w20: v1(1940,3490) 1940,3410 v1(2300,3050)
  Bottom Layer w20: P2.14@1869.29,3838.58 1869.29,3722.2 1879.13,3722.2 1895.51,3705.83 1895.51,3661.05 1935.76,3620.81 1935.76,3568.79 1940,3564.54 v1(1940,3490) ; v1(2300,3050) 2620,2730 2620,2289.74 2614.17,2283.91 2614.17,1842.52 v1(2614.96,1841.73)
uDAC1: R99.1 U3.22 | length 2040.9
  Top Layer w8: U3.22@2165.35,1759.84 2165.35,2086.61 2224.41,2145.67
  Top Layer w20: 2224.41,2145.67 2224.41,2836.54 2881.97,3494.09 R99.1@2881.97,3503.94
uDAC2: R105.1 U3.21 | length 1914.7
  Top Layer w8: U3.21@2185.04,1759.84 2185.04,2047.24 2283.46,2145.67
  Top Layer w20: 2283.46,2145.67 2283.46,2777.48 2881.97,3375.98 R105.1@2881.97,3385.83
uDAC3: R101.1 U3.20 | length 1799
  Top Layer w8: U3.20@2204.72,1759.84 2204.72,2017.72 2332.68,2145.67
  Top Layer w20: 2332.68,2145.67 2332.68,2716.54 2883.86,3267.72 R101.1@2883.86,3277.56
uDI1: R55.1 U3.44 | length 201.2
  Top Layer w8: R55.1@1712.6,1427.17 1712.6,1437.01 1742.13,1466.54 U3.44@1891.73,1466.54
uDI2: R57.1 U3.45 | length 253.7
  Top Layer w8: R57.1@1712.6,1328.74 1712.6,1338.58 1786.85,1412.84 1786.85,1446.85 U3.45@1891.73,1446.85
uDI3: R59.1 U3.47 | length 275.5
  Top Layer w8: R59.1@1710.71,1230.32 1710.71,1240.16 1815.44,1344.89 1815.44,1371 1851.92,1407.48 U3.47@1891.73,1407.48
uDI4: R61.1 U3.48 | length 353.3
  Top Layer w8: R61.1@1710.71,1131.89 1710.71,1141.73 1838.73,1269.75 1838.73,1373.07 1853.45,1387.8 U3.48@1891.73,1387.8
uDI5: R63.1 U3.50 | length 420.7
  Top Layer w8: R63.1@1712.6,1033.46 1762.88,1033.46 1988.19,1258.77 1988.19,1309.57 U3.50@1987.46,1310.29
uDI6: R65.1 U3.54 | length 630.4
  Top Layer w8: R65.1@1710.71,935.04 1881.96,935.04 2066.93,1120.01 2066.93,1183.7 2060.61,1190.02 2060.61,1211.56 2066.93,1217.87 2066.93,1221.54 2068.56,1223.17 2068.56,1257.14 2066.93,1258.77 U3.54@2066.93,1311.02
uDI7: R69.1 U3.56 | length 699.9
  Top Layer w8: R69.1@1712.6,836.61 1799.47,836.61 1878.54,915.68 1890.09,915.68 2106.3,1131.89 2106.3,1183.7 2112.61,1190.02 2112.61,1211.56 2106.3,1217.87 2106.3,1309.57 U3.56@2105.57,1310.29
uDI8: R71.1 U3.57 | length 769.9
  Top Layer w8: R71.1@1710.71,738.19 1710.71,748.03 1732.3,769.62 1759.08,769.62 1890.14,900.68 1904.62,900.68 2125.98,1122.05 2125.98,1182.17 2127.61,1183.8 2127.61,1217.77 2125.98,1219.4 2125.98,1309.57 U3.57@2125.26,1310.29
uDO1: R26.1 U3.23 | length 1850.8
  Top Layer w8: R26.1@1840.55,3484.25 1840.55,3474.41 2145.67,3169.29 U3.23@2145.67,1759.84
uDO2: R28.1 U3.24 | length 1713.3
  Top Layer w8: R28.1@1840.55,3354.89 1840.55,3345.05 2125.98,3059.62 U3.24@2125.98,1759.84
uDO3: R30.1 U3.25 | length 1575.8
  Top Layer w8: R30.1@1840.55,3225.53 1840.55,3172.76 2106.3,2907.01 U3.25@2106.3,1759.84
uDO4: R35.1 U3.26 | length 1438.3
  Top Layer w8: R35.1@1840.55,3096.18 1840.55,3043.4 2086.61,2797.33 U3.26@2086.61,1759.84
uDO5: R40.1 U3.27 | length 1300.7
  Top Layer w8: R40.1@1840.55,2966.82 1840.55,2914.04 2066.93,2687.66 U3.27@2066.93,1759.84
uDO6: R42.1 U3.28 | length 1163.2
  Top Layer w8: R42.1@1840.55,2837.46 1840.55,2784.68 2047.24,2577.99 U3.28@2047.24,1759.84
uDO7: R44.1 U3.29 | length 1025.7
  Top Layer w8: R44.1@1840.55,2708.1 1840.55,2655.32 2027.56,2468.31 U3.29@2027.56,1759.84
uDO8: R46.1 U3.30 | length 888.2
  Top Layer w8: R46.1@1840.55,2578.74 1840.55,2568.9 2007.87,2401.58 U3.30@2007.87,1759.84
uENBL: C7.1 P2.6 U3.4 | length 2875
  Top Layer w8: U3.4@2340.55,1446.85 2339.82,1447.58 2313.95,1447.58 2263.78,1497.75 2263.78,1651.86 2511.81,1899.89 v1(2511.81,1905.51)
  Top Layer w20: v1(2540,2730) v1(2770,2960) ; v1(2550,3700) 2550,3550 2600,3500 v1(2600,3350)
  Bottom Layer w20: v1(2511.81,1905.51) 2511.81,2068.92 2497.53,2083.2 2497.53,2687.53 v1(2540,2730) ; v1(2550,3700) 2552.71,3700 2564.28,3711.57 C7.1@2677.17,3711.57 2669.29,3719.45 P2.6@2669.29,3838.58 ; v1(2600,3350) 2600,3224.75 2770,3054.75 v1(2770,2960)
"uHOLD FLASH": R17.1 U3.36 U4.7 | length 1911.1
  Top Layer w8: 1248.15,2372.21 1930.29,1690.07 1930.29,1636.7 1918.34,1624.74 1892.46,1624.74 U3.36@1891.73,1624.02
  Top Layer w20: U4.7@731.7,2297.43 696.62,2297.43 665.49,2328.57 665.49,2338.91 643.12,2361.28 692.33,2410.49 R17.1@692.33,2471.92 702.17,2471.92 801.88,2372.21 1248.15,2372.21
UP: C33.1 R22.2 S5.1 S5.2 U3.61 | length 1988.2
  Top Layer w8: v1(2027.56,1439.48) 2102.14,1439.48 2204,1337.63 2204,1311.75 U3.61@2204.72,1311.02
  Bottom Layer w20: R22.2@936.93,777.56 936.46,778.03 936.46,875.51 C33.1@935.98,875.98 935.98,885.83 907.39,914.43 897.54,914.43 885.83,926.14 S5.1@885.83,976.38 S5.2@885.83,1289.37 1388.08,1289.37 1538.19,1439.48 v1(2027.56,1439.48)
uREGSEL: C6.1 P2.4 U3.3 | length 2785.8
  Top Layer w8: U3.3@2340.55,1427.17 2339.82,1427.89 2312.42,1427.89 2244.09,1496.22 2244.09,1657.33 2468.5,1881.73 v1(2468.5,1913.39)
  Top Layer w20: v1(2500,2780) 2788.09,3068.09 2788.09,3078.09 v1(2790,3080) ; v1(2770,3700) 2770,3595 2790,3575 v1(2790,3470)
  Bottom Layer w20: v1(2468.5,1913.39) 2468.5,2747.86 2500,2779.35 v1(2500,2780) ; v1(2770,3700) 2772.71,3700 2794.12,3721.42 2864.57,3721.42 2869.29,3726.14 P2.4@2869.29,3838.58 ; v1(2790,3080) v1(2790,3470)
"uSPI CLK": R15.1 U3.38 U4.6 | length 1811.8
  Top Layer w8: 1246.66,2247.43 1683.07,1811.02 v1(1683.07,1722.44) ; v1(1732.28,1633.86) 1751.71,1614.43 1795.02,1614.43 1824.07,1585.37 1891,1585.37 U3.38@1891.73,1584.65
  Top Layer w20: R15.1@593.9,2471.92 593.9,2372.31 619.76,2346.46 619.76,2323.94 696.27,2247.43 U4.6@731.7,2247.43 1246.66,2247.43
  Bottom Layer w8: v1(1683.07,1722.44) 1686.29,1719.22 1686.29,1703.47 1732.28,1657.48 v1(1732.28,1633.86)
"uSPI MISO": R14.1 U3.39 U4.2 | length 2040
  Top Layer w8: U4.2@465.95,2297.43 561.22,2297.43 865.31,1993.35 1195.63,1993.35 1505.91,1683.07 v1(1614.17,1683.07) ; v1(1614.17,1624.02) 1637.39,1600.8 1732.17,1600.8 1733.54,1599.43 1788.81,1599.43 1823.27,1564.96 U3.39@1891.73,1564.96
  Top Layer w20: R14.1@216.54,2362.2 276.78,2362.2 341.55,2297.43 U4.2@465.95,2297.43
  Bottom Layer w8: v1(1614.17,1624.02) v1(1614.17,1683.07)
"uSPI MOSI": R13.1 U3.40 U4.5 | length 2022
  Top Layer w8: 1149.02,2197.43 v1(1653.54,1692.91) ; v1(1702.76,1574.8) 1704.63,1576.68 1785.53,1576.68 1816.93,1545.28 U3.40@1891.73,1545.28
  Top Layer w20: R13.1@314.96,2470.47 457.56,2470.47 583.26,2344.77 583.26,2310.44 696.27,2197.43 U4.5@731.7,2197.43 1149.02,2197.43
  Bottom Layer w8: v1(1653.54,1692.91) 1657.75,1688.7 1657.75,1619.81 v1(1702.76,1574.8)
uVs1: C60.1 R85.2 U3.18 | length 1286.7
  Top Layer w8: U3.18@2244.09,1759.84 2244.82,1760.57 2244.82,1786.45 2305.92,1847.55 2320.93,1847.55 2401.57,1928.19 2411.42,1928.19
  Top Layer w20: C60.1@2403.54,2073.86 2416.38,2073.86 2416.38,2076.85 2428.98,2089.45 2431.97,2089.45 2477.09,2134.57 2477.09,2290.09 2923.23,2736.22 R85.2@2923.23,2746.06 ; 2411.42,1928.19 C60.1@2411.42,2065.98
uVs2: C65.1 R94.2 U3.16 | length 997.5
  Top Layer w8: U3.16@2340.55,1683.07 2352.01,1683.07 2353.77,1684.83 2353.77,1696.29 2547.24,1889.76 2561.02,1903.54 ; C65.1@2541.34,2069.92 C65.1@2561.02,2050.24
  Top Layer w20: C65.1@2541.34,2069.92 2548.55,2069.92 2564.14,2085.51 2564.14,2110.57 2849.83,2396.25 2888.37,2396.25 R94.2@2893.7,2401.57 ; 2561.02,1903.54 C65.1@2561.02,2050.24
uVs3: C59.2 R83.2 U3.15 | length 872
  Top Layer w8: U3.15@2340.55,1663.39 2363.24,1663.39 2366.02,1666.17 2369.21,1666.17 2379.11,1676.07 2379.11,1682.26 2629.28,1932.43
  Top Layer w20: 2629.28,1932.43 2728.59,2031.74 2774.77,2031.74 2782.39,2039.37 2853.26,1968.5 3000.08,1968.5 3009.92,1958.66 R83.2@3009.92,1968.5
uVs4: C64.2 R93.2 U3.14 | length 928.4
  Top Layer w8: U3.14@2340.55,1643.7 2341.28,1644.43 2380.89,1644.43 2664.65,1928.19 ; C64.2@2875.98,1928.19 C64.2@2879.92,1924.25
  Top Layer w20: 2664.65,1928.19 C64.2@2875.98,1928.19 ; C64.2@2879.92,1924.25 2879.92,1868.11 3004.17,1743.86 3004.17,1728.19 R93.2@3019.76,1712.6
"uWP FLASH": R18.1 U3.35 U4.3 | length 2035.6
  Top Layer w8: U4.3@428.47,2247.43 428.47,2245.39 405.74,2222.65 405.74,2143.47 570.87,1978.35 1171.26,1978.35 1492.54,1657.07 1713.53,1657.07 1726.16,1669.7 1794.87,1669.7 1820.14,1644.43 1891,1644.43 U3.35@1891.73,1643.7
  Top Layer w20: R18.1@216.54,2263.78 412.13,2263.78 U4.3@428.47,2247.43
VCC: C4.1 D1.1 R4.2 U2.1 | length 414.7
  Top Layer w20: D1.1@3244.09,501.97 3244.09,520.47 3251.81,528.19 3270.31,528.19 3282.13,540 C4.1@3632.2,540
VDDA: C13.1 C18.1 C19.1 C20.1 C21.1 C22.1 C23.1 C24.1 C25.1 L2.1 U3.13 U3.17 U3.32 U3.33 | length 1927
  Top Layer w8: v1(1840.86,1695.91) 1842.87,1695.91 1855.71,1683.07 U3.33@1891.73,1683.07 ; v1(1968.5,1683.07) U3.32@1968.5,1759.84 1968.5,1805.07 1978.35,1814.91 v1(1978.35,1820.87) ; v1(2260,1710) 2263.05,1713.05 2263.05,1759.11 U3.17@2263.78,1759.84 ; U3.13@2340.55,1624.02 2381.84,1624.02 2387.75,1618.11 v1(2393.7,1618.11)
  Bottom Layer w8: v1(1840.86,1695.91) 1844.54,1699.59 1867.86,1699.59 1909.45,1741.18 C20.1@1919.29,1741.18 ; C18.1@1967.56,1614.17 1968.5,1615.12 v1(1968.5,1683.07)
  Bottom Layer w20: C21.1@1830.71,1741.18 C20.1@1909.45,1741.18 ; C20.1@1919.29,1741.18 1929.13,1741.18 1966.59,1703.72 1966.59,1684.98 v1(1968.5,1683.07) 1971.21,1683.07 1976.28,1678 2039.29,1678 2071.29,1710 v1(2260,1710) ; C19.1@1967.56,1525.59 C18.1@1967.56,1614.17 ; v1(1978.35,1820.87) 1981.05,1820.87 1994.12,1807.8 2093.66,1807.8 2120.66,1834.8 2159.61,1834.8 2175.2,1850.39 L2.1@2175.2,1860.24 C13.1@2175.2,1947.87 ; C22.1@2322.83,1770.71 C22.1@2332.68,1760.87 ; C25.1@2323.78,1466.54 C24.1@2323.78,1555.12 2372.05,1555.12 2391.79,1574.86 2391.79,1616.2 v1(2393.7,1618.11) 2391.79,1620.02 2349.98,1620.02 v1(2260,1710) ; C23.1@2411.42,1741.18 2396.65,1755.94 2337.6,1755.94 C22.1@2332.68,1760.87 ; v1(2260,1710) 2261.91,1711.91 2261.91,1719.63 2303.15,1760.87 C22.1@2332.68,1760.87
"Vs1 n": P8.4 R84.1 | length 464.4
  Top Layer w8: P8.4@3859.84,2478.74 3869.84,2478.74 3910.84,2519.74 3910.84,2604.91 3907.48,2608.27
  Top Layer w20: R84.1@3677.01,2651.73 3661.42,2667.32 R84.1@3661.42,2677.17 3838.58,2677.17 3907.48,2608.27
"Vs1 p": P8.3 R86.1 | length 155.5
  Top Layer w20: R86.1@3661.42,2588.58 R86.1@3661.42,2578.74 3661.42,2568.9 3751.57,2478.74 P8.3@3759.84,2478.74
"Vs2 n": P8.6 R92.1 | length 372.3
  Top Layer w20: R92.1@3525.51,2470.47 3691.64,2470.47 3733.68,2428.43 3800.15,2428.43 3849.84,2378.74 P8.6@3859.84,2378.74
"Vs2 p": P8.5 R95.1 | length 237.1
  Top Layer w20: R95.1@3525.51,2372.05 3532.2,2378.74 P8.5@3759.84,2378.74
"Vs3 p": P8.7 R82.1 | length 393.6
  Top Layer w20: P8.7@3759.84,2278.74 3749.84,2278.74 3702.84,2231.74 3702.84,2122.11 3761.73,2063.22 R82.1@3761.73,1938.98
"Vs4 p": P8.9 R91.1 | length 465.6
  Top Layer w20: R91.1@3692.83,1781.5 3692.83,1791.34 3708.43,1806.93 3714.75,1806.93 3804.32,1896.5 3804.32,2058.81 3759.84,2103.29 P8.9@3759.84,2178.74
"W\C\ EPROM1": R34.2 U3.41 U6.7 | length 1675
  Top Layer w8: R34.2@954.72,1771.65 964.57,1761.81 1269.69,1761.81 1486.22,1545.28 1789.37,1545.28 1809.06,1525.59 U3.41@1891.73,1525.59
  Top Layer w20: U6.7@579.72,1865.55 552.52,1865.55 521.39,1834.42 521.39,1752.8 572.12,1702.06 875.29,1702.06 944.88,1771.65 R34.2@954.72,1771.65
pads on no net: MH1.1 MH2.1 MH3.1 MH4.1 P2.0 P2.15 P2.16 U2.5 U2.7 U2.8

## Polygon pours and split planes (outlines as drawn)
3V3D on POWER "3V3D_L03_P000" (solid, pour order 0): 2100,3900 2100,960 3900,960 3900,30 3890,20 20,20 20,3900
+5VD on POWER "+5VD_L03_P001" (solid, pour order 1): 2130,3900 2150,3880 2150,1000 3900,1000 3900,3920 2150,3920
"OSC IN" on Top Layer "OSC_IN_L01_P033" (solid, pour order 33): 2791.34,1129.92 2791.34,1358.27 2653.54,1358.27 2653.54,1472.44 2937.01,1472.44 2937.01,1129.92
NetC26_2 on Top Layer "NETC26_2_L01_P030" (solid, pour order 30): 2643.47,1716.54 2929.13,1716.54 2929.13,1464.57 2791.34,1464.57 2791.34,1535.43 2787.4,1535.43 2783.46,1535.43 2643.47,1535.43
0V on Top Layer "0V_L01_P029" (solid, pour order 29): 3720,1490 3890,1490 3890,380 3710,380
VCC on Top Layer "VCC_L01_P028" (solid, pour order 28): 3520,960 3520,871.46 3660,871.46 3660,730 3530,730 3540,720 3540,330 3690,330 3690,960
NetD2_2 on Top Layer "NETD2_2_L01_P026" (solid, pour order 26): 3560,1070 3560,1130 3670,1130 3670,1000 3660,990 3530,990 3530,890 3670,890 3670,830 3530,830 3530,780 3130,780 3130,1070
3V3D on Top Layer "3V3D_L01_P023" (solid, pour order 23): 2610,1080 2610,830 2840,830 2840,720 2950,720 2950,930 3100,930 3100,1020 2950,1020 2950,1080
+5VD on Top Layer "+5VD_L01_P020" (solid, pour order 20): 3710,1160 3540,1160 3540,1080 3150,1080 3150,1070 3090,1010 2960,1010 2960,1130 3010,1130 3010,1340 3530,1340 3530,1490 3710,1490
0V on GND "0V_L02_P002" (solid, pour order 2): 20,3920 3920,3920 3920,20 20,20

## Keep-outs
Keep-Out Layer:
  the board outline again, w10

## Silkscreen, mask and mechanical layers (free items; w line width, h text height)
Top Overlay:
  drawing of 53 lines, arcs and shapes, not listed
  text "Muhammet Eray Guven" at 532.12,3847.32 h60
  text "Mehmet Furkan Sahin" at 531.86,3784.19 h60
Bottom Overlay:
  text "TEST2" at 1330.11,2453.72 h50 r90
  text "TEST1" at 1935.45,1362.81 h50
  text "DOWN" at 1736.82,932.71 h50 r270
  text "UP" at 823.69,929.73 h50
  text "ENTER" at 597.57,897.64 h50
  text "ESC" at 1275.41,847.06 h50

## Text inside footprints (layer, text, board x,y; h text height)
C4: Top Overlay "+" at 3541.1,660 h50
C5: Top Overlay "+" at 3560.47,1438.9 h50
P5: Top Overlay "20" at 183.9,2675.42 h50 r90; Top Overlay "2" at 183.9,3711.42 h50 r90; Top Overlay "1" at 83.9,3711.42 h50 r90; Top Overlay "19" at 83.9,2675.42 h50 r90
P6: Top Overlay "20" at 211.85,501.8 h50 r90; Top Overlay "2" at 211.85,1537.8 h50 r90; Top Overlay "1" at 111.85,1537.8 h50 r90; Top Overlay "19" at 111.85,501.8 h50 r90
P8: Top Overlay "9" at 3774.84,2086.74 h50 r90; Top Overlay "1" at 3774.84,2638.74 h50 r90; Top Overlay "2" at 3874.84,2638.74 h50 r90; Top Overlay "10" at 3874.84,2086.74 h50 r90
P9: Top Overlay "9" at 3743.74,2944.61 h50 r90; Top Overlay "1" at 3743.74,3496.61 h50 r90; Top Overlay "2" at 3843.74,3496.61 h50 r90; Top Overlay "10" at 3843.74,2944.61 h50 r90